# Altium PCB PCB1.PcbDoc (part 2 of 2)
Units mm, origin at the board's own origin, x right, y up, seen from the top; angles counter-clockwise.
Board outline 60 x 40 mm, 2 copper layers (Top Layer, Bottom Layer), stack 0.771 mm thick; 79 components, 50 nets, 240 pads, 354 vias.
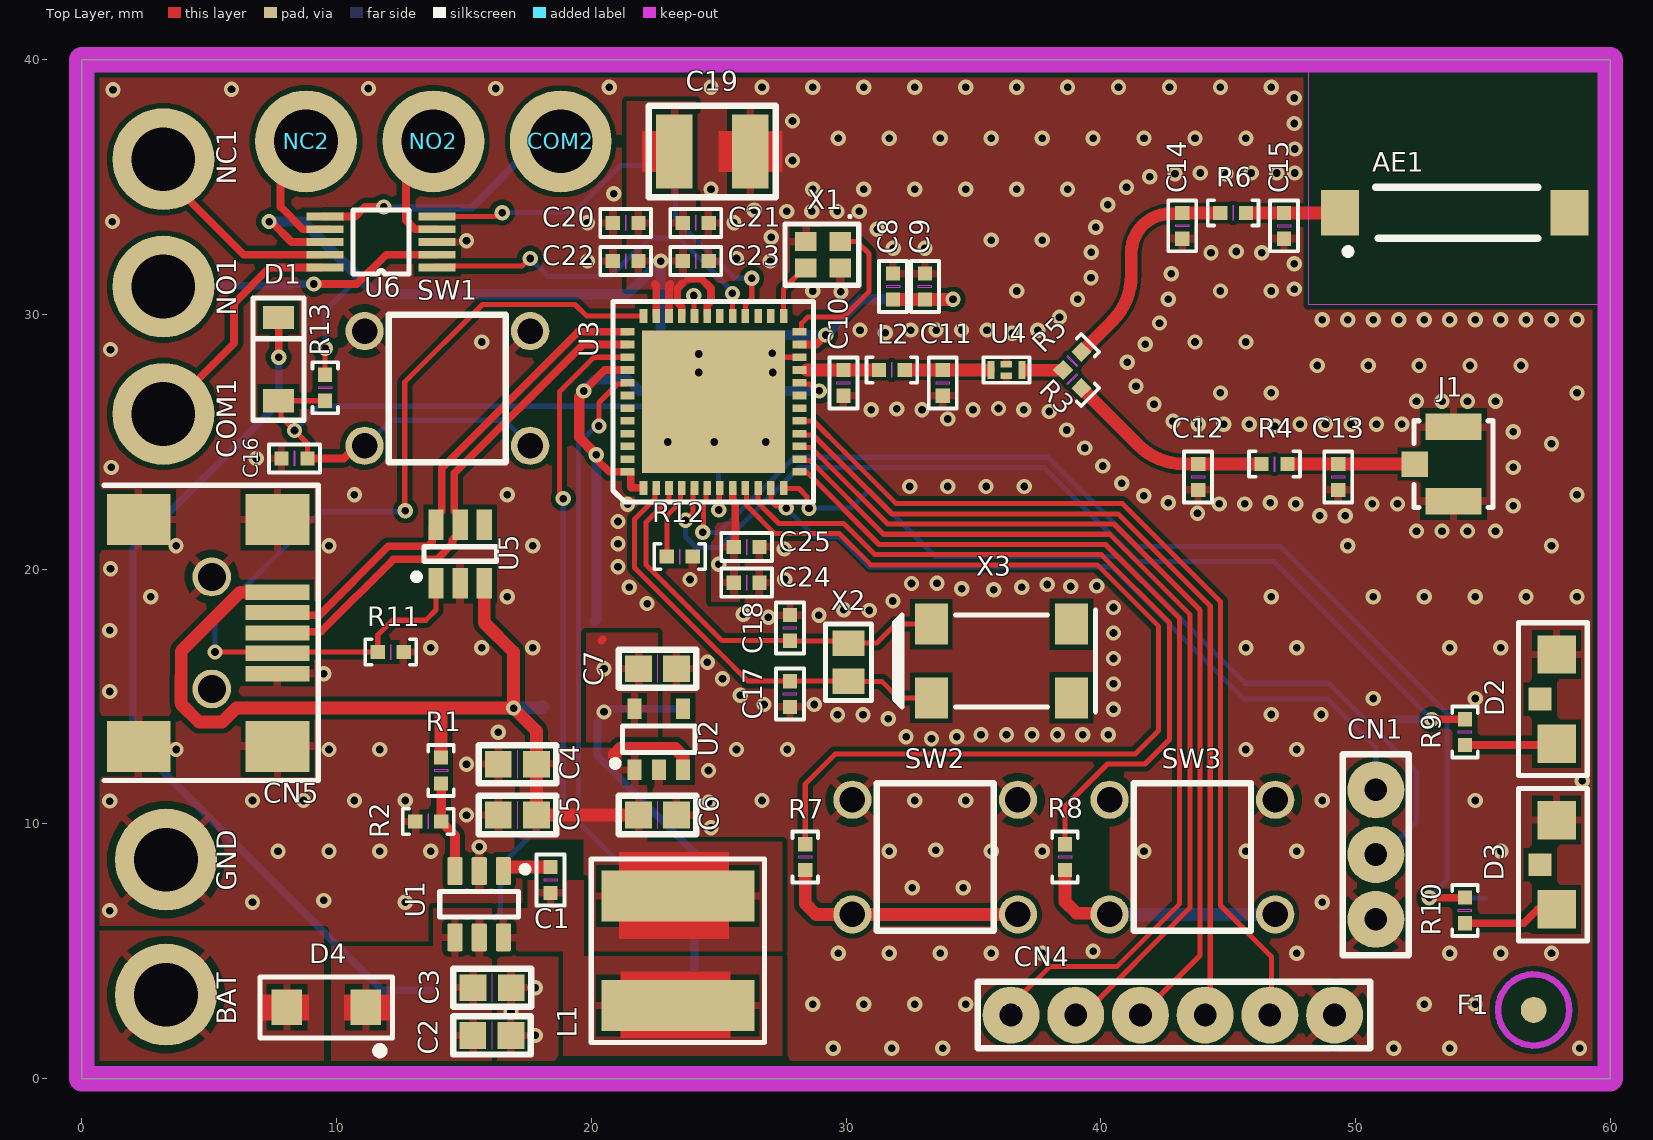
[diagram p0: Top Layer view]

## Part data (continued)
L2: "Inductor RF Chip Multi-Layer 2.7nH 0.3nH 100MHz 8Q-Factor Air 300mA 150mOhm DCR 0402 T/R", Case Code (Imperial)=0402, Case Code (Metric)=1005, Current Rating=300mA, DC Resistance (DCR)=150mR, Manufacturer=Murata, Max Operating Temperature=125°C, Min Operating Temperature=-55°C, Package Quantity=1, RMS Current (Irms)=800mA, Self Resonant Frequency=6GHz, Supplier Part Number=81-LQG15HS2N7S02D, Test Frequency=100MHz, Case/Package=0402, Category="Fixed Inductors", ComponentLink1Description=https://datasheet.ciiva.com/11801/0900766b8090d685-11801391.pdf?src-supplier=Rs, ComponentLink1URL=https://datasheet.ciiva.com/11801/0900766b8090d685-11801391.pdf?src-supplier=Rs, ComponentLink2Description=https://datasheet.ciiva.com/1038/l0075s0083lqg15hs-1038151.pdf?src-supplier=Digikey, ComponentLink2URL=https://datasheet.ciiva.com/1038/l0075s0083lqg15hs-1038151.pdf?src-supplier=Digikey, ComponentLink3Description=https://datasheet.ciiva.com/1038/l0075s0083lqg15hs-1038152.pdf?src-supplier=Digikey, ComponentLink3URL=https://datasheet.ciiva.com/1038/l0075s0083lqg15hs-1038152.pdf?src-supplier=Digikey, ComponentLink4Description=https://datasheet.ciiva.com/1038/l0075s0083lqg15hs-1038153.pdf?src-supplier=Digikey, ComponentLink4URL=https://datasheet.ciiva.com/1038/l0075s0083lqg15hs-1038153.pdf?src-supplier=Digikey, ComponentLink5Description=https://datasheet.ciiva.com/8510/l0075s0083lqg15hs-8510853.pdf?src-supplier=Avnet, ComponentLink5URL=https://datasheet.ciiva.com/8510/l0075s0083lqg15hs-8510853.pdf?src-supplier=Avnet, Core Material=Air, DC Current=300mA, Depth=0.55mm, ESR=120mR, Height=0.5mm, Height - Seated (Max)=0.022inch, Lead Free="Lead Free", Length=1mm, Manufacturer Part Number=LQG15HS2N7S02D, Max Current Rating=300mA, Max DC Current=300mA, Military Standard=Not, Mounting Technology="Surface Mount", Packaging="Tape and Reel", Pricing="1=0,1, 10=0,037, 50=0,037, 100=0,029, 1000=0,025, 10000=0,018 (USD)", Q Factor=8, Radiation Hardening=No, RoHS=Yes, RoHS Compliant=Yes, Series=LQG15HS, Shielding=Unshielded, Stock=7929, Supplier=Mouser, Termination=SMD/SMT, Width=0.02inch
R1: "RES - 118K 1/16W 0402 ±1%", Case Code (Imperial)=0402, Case Code (Metric)=1005, Manufacturer=Yageo, Max Operating Temperature=155°C, Max Power Dissipation=63mW, Min Operating Temperature=-55°C, Package Quantity=10000, Power Rating=62.5mW, Supplier Part Number=YAG2369CT-ND, Temperature Coefficient=100ppm/°C, Tolerance=1%, Voltage Rating=50V, .Mouting=SMT, .PCBChecked="Alex Batista", .SCHChecked="Alex Batista", Case/Package=0402, Category="Chip SMD Resistors", ComponentLink1Description=https://datasheet.ciiva.com/8887/pyu-rc0402-51-rohs-l-6-8887658.pdf?src-supplier=Avnet, ComponentLink1URL=https://datasheet.ciiva.com/8887/pyu-rc0402-51-rohs-l-6-8887658.pdf?src-supplier=Avnet, ComponentLink2Description=https://datasheet.ciiva.com/12558/pyu-rc0402-51-rohs-l-6-r-8721-12558524.pdf?src-supplier=Mouser, ComponentLink2URL=https://datasheet.ciiva.com/12558/pyu-rc0402-51-rohs-l-6-r-8721-12558524.pdf?src-supplier=Mouser, ComponentLink3Description=https://datasheet.ciiva.com/2552/pyu-r-int-thick-7-2552967.pdf?src-supplier=Digi-Key, ComponentLink3URL=https://datasheet.ciiva.com/2552/pyu-r-int-thick-7-2552967.pdf?src-supplier=Digi-Key, ComponentLink4Description=https://datasheet.ciiva.com/26829/getdatasheetpartid-702380-26829882.pdf?src-supplier=Verical, ComponentLink4URL=https://datasheet.ciiva.com/26829/getdatasheetpartid-702380-26829882.pdf?src-supplier=Verical, Construction=Rectangular, Contact Plating=Tin,Matte, Depth=0.5mm, Features="Moisture Resistant", Height=0.016inch, Lead Free="Lead Free", Length=1mm, Manufacturer 1=Yageo, Manufacturer Part Number=RC0402FR-07118KL, Manufacturer Part Number 1=RC0402FR-07118KL, Military Standard=Not, Number of Terminations=2, Packaging="Tape and Reel", Pricing="1=0.1, 10=0.014, 50=0.0084, 100=0.007, 500=0.00464, 1000=0.00396, 5000=0.00282 (USD)", RoHS=Yes, RoHS Compliant=Yes, Series=RC, Stock=556112, Supplier=Digi-Key, Termination=SMD/SMT, Voltage Rating (DC)=50V, Width=0.5mm
R2: "RES - 22K1 1/16W 0402 ±1%", Case Code (Imperial)=0402, Case Code (Metric)=1005, Manufacturer=Yageo, Max Operating Temperature=155°C, Max Power Dissipation=63mW, Min Operating Temperature=-55°C, Package Quantity=1, Power Rating=62.5mW, Resistance Tolerance=1%, Resistor Type="Thick Film", Supplier Part Number=311-22.1KLRCT-ND, Temperature Coefficient=100ppm/°C, Voltage Rating=50V, .Mouting=SMT, .PCBChecked="Alex Batista", .SCHChecked="Alex Batista", Case/Package=0402, Category="Chip SMD Resistors", ComponentLink1Description=https://datasheet.ciiva.com/2553/pyu-r-int-thick-7-2553200.pdf?src-supplier=Digi-Key, ComponentLink1URL=https://datasheet.ciiva.com/2553/pyu-r-int-thick-7-2553200.pdf?src-supplier=Digi-Key, ComponentLink2Description=https://datasheet.ciiva.com/2553/pyu-r-int-thick-7-2553201.pdf?src-supplier=Digi-Key, ComponentLink2URL=https://datasheet.ciiva.com/2553/pyu-r-int-thick-7-2553201.pdf?src-supplier=Digi-Key, ComponentLink3Description=https://datasheet.ciiva.com/2553/pyu-r-int-thick-7-2553202.pdf?src-supplier=Digi-Key, ComponentLink3URL=https://datasheet.ciiva.com/2553/pyu-r-int-thick-7-2553202.pdf?src-supplier=Digi-Key, Construction=Rectangular, Depth=0.5mm, Features="Moisture Resistant", Height=0.016inch, Lead Free="Lead Free", Length=0.039inch, Manufacturer 1=Yageo, Manufacturer Part Number=RC0402FR-0722K1L, Manufacturer Part Number 1=RC0402FR-0722K1L, Military Standard=Not, Number of Terminations=2, Packaging="Tape and Reel", Pricing="1=0.1, 10=0.014, 50=0.0084, 100=0.007, 500=0.00464, 1000=0.00396, 5000=0.00282 (USD)", Reach SVHC Compliant=No, RoHS=Yes, RoHS Compliant=Yes, Series=RC, Stock=435944, Supplier=Digi-Key, Technology="THICK FILM", Termination=SMD/SMT, Tolerance=1%, Voltage Rating (DC)=50V, Width=0.02inch, Working Voltage=50V
R3 R4 R5 R6: "GENERAL PURPOSE CHIP RESISTOR Metal Glaze/thick Film, 0.0625W, 0ohm, Surface Mount, 0402", Case Code (Imperial)=0402, Case Code (Metric)=1005, Manufacturer=Yageo, Max Operating Temperature=155°C, Max Power Dissipation=63mW, Min Operating Temperature=-55°C, Package Quantity=1, Power Rating=62.5mW, Resistance Tolerance=5%, Resistor Type="Thick Film", Supplier Part Number=3375797, Temperature Coefficient=200ppm/°C, Voltage Rating=50V, Case/Package=0402, Category="Chip SMD Resistors", ComponentLink1Description=https://datasheet.ciiva.com/2452/pyu-rc0402-51-rohs-l-6-2452608.pdf?src-supplier=Digikey, ComponentLink1URL=https://datasheet.ciiva.com/2452/pyu-rc0402-51-rohs-l-6-2452608.pdf?src-supplier=Digikey, ComponentLink2Description=https://datasheet.ciiva.com/11808/0900766b80c66297-11808195.pdf?src-supplier=Rs, ComponentLink2URL=https://datasheet.ciiva.com/11808/0900766b80c66297-11808195.pdf?src-supplier=Rs, ComponentLink3Description=https://datasheet.ciiva.com/2452/pyu-r-int-thick-7-2452609.pdf?src-supplier=Digikey, ComponentLink3URL=https://datasheet.ciiva.com/2452/pyu-r-int-thick-7-2452609.pdf?src-supplier=Digikey, ComponentLink4Description=https://datasheet.ciiva.com/2452/pyu-r-int-thick-7-2452610.pdf?src-supplier=Digikey, ComponentLink4URL=https://datasheet.ciiva.com/2452/pyu-r-int-thick-7-2452610.pdf?src-supplier=Digikey, ComponentLink5Description=https://datasheet.ciiva.com/8896/pyu-rc0402-51-rohs-l-6-8896201.pdf?src-supplier=Avnet, ComponentLink5URL=https://datasheet.ciiva.com/8896/pyu-rc0402-51-rohs-l-6-8896201.pdf?src-supplier=Avnet, ComponentLink6Description=https://datasheet.ciiva.com/15189/getdatasheetpartid-326379-15189533.pdf?src-supplier=Verical, ComponentLink6URL=https://datasheet.ciiva.com/15189/getdatasheetpartid-326379-15189533.pdf?src-supplier=Verical, ComponentLink7Description=https://datasheet.ciiva.com/7983/1018594-7983535.pdf?src-supplier=Element14, ComponentLink7URL=https://datasheet.ciiva.com/7983/1018594-7983535.pdf?src-supplier=Element14, ComponentLink8Description=https://datasheet.ciiva.com/22747/1018594-22747515.pdf?src-supplier=Element14, ComponentLink8URL=https://datasheet.ciiva.com/22747/1018594-22747515.pdf?src-supplier=Element14, Construction=Rectangular, Contact Plating=Tin,Matte, Depth=0.5mm, Features="Moisture Resistant", Height=0.016inch, Lead Free="Lead Free", Length=1mm, Manufacturer Part Number=RC0402JR-070RL, Military Standard=Not, Number of Terminations=2, Packaging="Tape and Reel", Pricing="10000=0,0007, 50000=0,0007, 200000=0,0007, 500000=0,0006, 1250000=0,0006 (USD)", Reach SVHC Compliant=Unknown, RoHS=Yes, RoHS Compliant=Yes, Series=RC, Stock=45190000, Supplier="Future Electronics", Technology="THICK FILM", Termination=SMD/SMT, Tolerance=5%, Width=0.02inch
R7 R8 R12: "SMD Chip Resistor 1 Kohm ½ 1% 62.5 Mw 0402 [1005 Metric] Thick Film General Purpose", Case Code (Imperial)=0402, Case Code (Metric)=1005, Manufacturer=Yageo, Max Operating Temperature=155°C, Max Power Dissipation=63mW, Min Operating Temperature=-55°C, Power Rating=62.5mW, Resistance Tolerance=1%, Resistor Type="Thick Film", Temperature Coefficient=100ppm/°C, Voltage Rating=50V, Case/Package=0402, Category="Chip SMD Resistors", ComponentLink1Description=https://datasheet.ciiva.com/11819/0900766b80c66297-11819477.pdf?src-supplier=Rs, ComponentLink1URL=https://datasheet.ciiva.com/11819/0900766b80c66297-11819477.pdf?src-supplier=Rs, ComponentLink2Description=https://datasheet.ciiva.com/7983/1018594-7983502.pdf?src-supplier=Element14, ComponentLink2URL=https://datasheet.ciiva.com/7983/1018594-7983502.pdf?src-supplier=Element14, ComponentLink3Description=https://datasheet.ciiva.com/22747/1018594-22747513.pdf?src-supplier=Element14, ComponentLink3URL=https://datasheet.ciiva.com/22747/1018594-22747513.pdf?src-supplier=Element14, ComponentLink4Description=https://datasheet.ciiva.com/17063/pyu-rc0402-51-rohs-l-6-r-17063193.pdf?src-supplier=Future+Electronics, ComponentLink4URL=https://datasheet.ciiva.com/17063/pyu-rc0402-51-rohs-l-6-r-17063193.pdf?src-supplier=Future+Electronics, ComponentLink5Description=https://datasheet.ciiva.com/7849/1018594-7849869.pdf?src-supplier=Element14, ComponentLink5URL=https://datasheet.ciiva.com/7849/1018594-7849869.pdf?src-supplier=Element14, ComponentLink6Description=https://datasheet.ciiva.com/7849/1018594-7849871.pdf?src-supplier=Element14, ComponentLink6URL=https://datasheet.ciiva.com/7849/1018594-7849871.pdf?src-supplier=Element14, ComponentLink7Description=https://datasheet.ciiva.com/12666/pyu-rc0402-51-rohs-l-6-r-12666741.pdf?src-supplier=Mouser, ComponentLink7URL=https://datasheet.ciiva.com/12666/pyu-rc0402-51-rohs-l-6-r-12666741.pdf?src-supplier=Mouser, Construction=Rectangular, Depth=0.5mm, Features="Moisture Resistant", Height=0.32mm, Lead Free="Lead Free", Length=1mm, Manufacturer Part Number=RC0402FR-071KL, Military Standard=Not, Number of Terminations=2, Packaging="Tape and Reel", Pins=2, Pricing="10000=0,00097, 20000=0,00093, 40000=0,0009, 60000=0,00087, 80000=0,00084 (USD)", Reach SVHC Compliant=No, RoHS=Yes, RoHS Compliant=Yes, Series=RC, Stock=9660000, Supplier=Avnet, Supplier Part Number=RC0402FR-071KL, Technology="THICK FILM", Termination=SMD/SMT, Tolerance=1%, Voltage Rating (AC)=50V, Voltage Rating (DC)=50V, Width=0.5mm
R9 R10: "Res Thick Film 0402 330 Ohm 5% 1/16W ±100ppm/°C Molded SMD SMD Paper T/R", Case/Package=0402, Manufacturer=Yageo, Max Operating Temperature=155°C, Min Operating Temperature=-55°C, Power Rating=63mW, Supplier Part Number=13-RC0402JR-13330RLCT-ND, Temperature Coefficient=100ppm/°C, Tolerance=5%, Category="Chip SMD Resistors", ComponentLink1Description=https://datasheet.ciiva.com/17423/pyu-rc0402-51-rohs-l-6-r-17423686.pdf?src-supplier=Future+Electronics, ComponentLink1URL=https://datasheet.ciiva.com/17423/pyu-rc0402-51-rohs-l-6-r-17423686.pdf?src-supplier=Future+Electronics, Construction=Rectangular, Contact Plating=Tin,Matte, Depth=0.5mm, Lead Free="Lead Free", Length=1mm, Manufacturer Part Number=RC0402JR-13330RL, Military Standard=Not, Packaging="Tape and Reel", Pricing="1=0,1, 10=0,006, 50=0,0056, 100=0,0051, 500=0,0046, 1000=0,00306, 5000=0,00246 (USD)", RoHS=Yes, RoHS Compliant=Yes, Stock=107022, Supplier=Digikey
R11 R13: "SMD Chip Resistor, 100 Kohm, ½ 5%, 62.5 Mw, 0402 [1005 Metric], Thick Film, General Purpose", Case Code (Imperial)=0402, Case Code (Metric)=1005, Manufacturer=Yageo, Max Operating Temperature=155°C, Max Power Dissipation=63mW, Min Operating Temperature=-55°C, Power Rating=62.5mW, Resistance Tolerance=5%, Resistor Type="Thick Film", Supplier Part Number=4246625, Temperature Coefficient=100ppm/°C, Voltage Rating=50V, Case/Package=0402, Category="Chip SMD Resistors", ComponentLink1Description=https://datasheet.ciiva.com/2491/pyu-r-int-thick-7-2491208.pdf?src-supplier=Digikey, ComponentLink1URL=https://datasheet.ciiva.com/2491/pyu-r-int-thick-7-2491208.pdf?src-supplier=Digikey, ComponentLink2Description=https://datasheet.ciiva.com/2491/pyu-r-int-thick-7-2491209.pdf?src-supplier=Digikey, ComponentLink2URL=https://datasheet.ciiva.com/2491/pyu-r-int-thick-7-2491209.pdf?src-supplier=Digikey, ComponentLink3Description=https://datasheet.ciiva.com/2491/pyu-r-int-thick-7-2491207.pdf?src-supplier=Digikey, ComponentLink3URL=https://datasheet.ciiva.com/2491/pyu-r-int-thick-7-2491207.pdf?src-supplier=Digikey, ComponentLink4Description=https://datasheet.ciiva.com/17052/pyu-rc0402-51-rohs-l-6-r-17052137.pdf?src-supplier=Future+Electronics, ComponentLink4URL=https://datasheet.ciiva.com/17052/pyu-rc0402-51-rohs-l-6-r-17052137.pdf?src-supplier=Future+Electronics, ComponentLink5Description=https://datasheet.ciiva.com/46394/1018594-46394941.pdf?src-supplier=Element14, ComponentLink5URL=https://datasheet.ciiva.com/46394/1018594-46394941.pdf?src-supplier=Element14, ComponentLink6Description=https://datasheet.ciiva.com/7850/1018594-7850133.pdf?src-supplier=Element14, ComponentLink6URL=https://datasheet.ciiva.com/7850/1018594-7850133.pdf?src-supplier=Element14, ComponentLink7Description=https://datasheet.ciiva.com/12668/pyu-rc0402-51-rohs-l-6-r-12668218.pdf?src-supplier=Mouser, ComponentLink7URL=https://datasheet.ciiva.com/12668/pyu-rc0402-51-rohs-l-6-r-12668218.pdf?src-supplier=Mouser, Construction=Rectangular, Depth=0.5mm, Features="Moisture Resistant", Lead Free="Lead Free", Length=1mm, Manufacturer Part Number=RC0402JR-07100KL, Military Standard=Not, Number of Terminations=2, Packaging="Tape and Reel", Pricing="10000=0,0006, 50000=0,0006, 250000=0,0005, 500000=0,0005, 1500000=0,0005 (USD)", Reach SVHC Compliant=Unknown, RoHS=Yes, RoHS Compliant=Yes, Series=RC, Stock=7850000, Supplier="Future Electronics", Termination=SMD/SMT, Tolerance=5%, Voltage Rating (AC)=50V
SW1 SW2 SW3: Manufacturer="Same Sky", Category="Tactile Switches", Manufacturer Part Number=TS02-66-130-BK-260-LCR-D
TP1 TP2 TP3 TP4 TP5 TP6 TP7 TP8: "Test Point"
U1: library part LMR54410DBVR, "IC - DC/DC BUCK, Current-mode, 1A, 1100kHz SOT32-6", Manufacturer="Texas Instruments", Supplier Part Number=296-LMR54410DBVRCT-ND, .Mouting=SMT, .PCBChecked="Alex Batista", .SCHChecked="Alex Batista", Category="Voltage Regulators - Switching", Manufacturer 1="Texas Instruments", Manufacturer Part Number=LMR54410DBVR, Manufacturer Part Number 1=LMR54410DBVR, Pricing="1=1.07, 10=0.959, 25=0.9108, 100=0.748, 250=0.69924, 500=0.61792, 1000=0.48783 (USD)", RoHS=No, Stock=13950, Supplier=Digi-Key
U2: "Ldo, Fixed, 3.3V, 0.6A, -40 To 85Deg C Rohs Compliant: Yes", Manufacturer=Diodes, Output Voltage=3.3V, Supplier Part Number=8130059, ComponentLink1Description=https://datasheet.octopart.com/AP7366-33W5-7-Diodes-Inc.-datasheet-147761854.pdf?src-supplier=Farnell, ComponentLink1URL=https://datasheet.octopart.com/AP7366-33W5-7-Diodes-Inc.-datasheet-147761854.pdf?src-supplier=Farnell, ComponentLink2Description=https://www.diodes.com/assets/Datasheets/AP7366.pdf?src-supplier=Digikey, ComponentLink2URL=https://www.diodes.com/assets/Datasheets/AP7366.pdf?src-supplier=Digikey, Manufacturer Part Number=AP7366-33W5-7, Number of Channels=1NUMBER, Pricing="3000=0,0633, 9000=0,0609, 15000=0,0598, 30000=0,0584, 60000=0,0561 (USD)", RoHS=Yes, Stock=9000, Supplier="Future Electronics"
U3: "MCU 32-Bit STM32WB55 ARM Cortex-M4F RISC 256KB Flash 1.71V to 3.6V 48-Pin UFQFPN T/R", Case/Package=UFQFPN, Current - Receiving=7.9mA, Current - Transmitting=12.7mA, Frequency=2.48GHz, Manufacturer=STMicroelectronics, Max Operating Temperature=105°C, Min Operating Temperature=-40°C, Supplier Part Number=497-STM32WB55CCU6-ND, Category=Microcontrollers, ComponentLink1Description=https://www.st.com/resource/en/datasheet/stm32wb55cc.pdf?src-supplier=Digikey, ComponentLink1URL=https://www.st.com/resource/en/datasheet/stm32wb55cc.pdf?src-supplier=Digikey, Data Rate=2Mbps, Interface=I2C,SPI,USB,UART,USART, Manufacturer Part Number=STM32WB55CCU6, Memory Size=256KB, Mounting Technology="Surface Mount", Number of GPIO=30, Pricing="1=5,19, 10=3,989, 25=3,6896, 80=3,41638 (USD)", RoHS=Yes, Sensitivity=-100dBm, Series=-, Stock=2269, Supplier=Digikey
U4: "FILTER, LOW PASS, 2.4GHz to 2.5GHz; Filter Type: Low Pass; Pass Band Frequency: 2.", Case Code (Imperial)=0603, Case Code (Metric)=1608, Frequency=2.45GHz, Manufacturer=TDK, Max Operating Temperature=85°C, Min Operating Temperature=-40°C, Package Quantity=4000, Supplier Part Number=445-15658-1-ND, Case/Package=0603, ComponentLink1Description=https://datasheet.ciiva.com/24123/dlf162500lt-5028a1-279920-24123794.pdf?src-supplier=Mouser, ComponentLink1URL=https://datasheet.ciiva.com/24123/dlf162500lt-5028a1-279920-24123794.pdf?src-supplier=Mouser, ComponentLink2Description=https://datasheet.ciiva.com/23909/1751212-23909058.pdf?src-supplier=Newark, ComponentLink2URL=https://datasheet.ciiva.com/23909/1751212-23909058.pdf?src-supplier=Newark, ComponentLink3Description=https://datasheet.ciiva.com/30018/rf-lpf-dlf162500lt-5028a1-en-30018074.pdf?src-supplier=Avnet, ComponentLink3URL=https://datasheet.ciiva.com/30018/rf-lpf-dlf162500lt-5028a1-en-30018074.pdf?src-supplier=Avnet, Insertion Loss=0.33dB, Manufacturer Part Number=DLF162500LT-5028A1, Mounting Technology="Surface Mount", Packaging="Tape and Reel", Pins=4, Pricing="1=0,48, 10=0,39, 25=0,3596, 50=0,3382, 100=0,318, 250=0,29324, 500=0,2758, 1000=0,25939 (USD)", Radiation Hardening=No, RoHS=Yes, RoHS Compliant=Yes, Series=DLF, Stock=8661, Supplier=Digikey, Termination=SMD/SMT
U5: "USBLC6 Series 4 Line 6 V Uni / Bi-Directional ESD Protection - SOT-23-6", Breakdown Voltage=6V, Case/Package=SOT-23, Clamping Voltage=17V, Leakage Current=150nA, Manufacturer=STMicroelectronics, Max Breakdown Voltage=10V, Max Operating Temperature=125°C, Max Reverse Leakage Current=2uA, Min Operating Temperature=-40°C, Operating Supply Voltage=860mV, Peak Pulse Current=5A, Peak Pulse Power=130W, Power Line Protection=Yes, Reverse Standoff Voltage=5V, Supplier Part Number=5949821, Test Current=1mA, Category="TVS Diodes", Clamping Voltage-Max=17V, ComponentLink1Description=https://datasheet.ciiva.com/16206/cd00047494-16206119.pdf?src-supplier=Future+Electronics, ComponentLink1URL=https://datasheet.ciiva.com/16206/cd00047494-16206119.pdf?src-supplier=Future+Electronics, ComponentLink2Description=https://datasheet.ciiva.com/15143/getdatasheetpartid-88767-15143364.pdf?src-supplier=Verical, ComponentLink2URL=https://datasheet.ciiva.com/15143/getdatasheetpartid-88767-15143364.pdf?src-supplier=Verical, ComponentLink3Description=https://datasheet.ciiva.com/27052/1493951-27052291.pdf?src-supplier=Jameco, ComponentLink3URL=https://datasheet.ciiva.com/27052/1493951-27052291.pdf?src-supplier=Jameco, ComponentLink4Description=https://datasheet.ciiva.com/14186/usblc6-4-st-eng-tds-14186570.pdf?src-supplier=Distrelec, ComponentLink4URL=https://datasheet.ciiva.com/14186/usblc6-4-st-eng-tds-14186570.pdf?src-supplier=Distrelec, ComponentLink5Description=https://datasheet.ciiva.com/1220/48344-1220005.pdf?src-supplier=Newark, ComponentLink5URL=https://datasheet.ciiva.com/1220/48344-1220005.pdf?src-supplier=Newark, ComponentLink6Description=https://datasheet.ciiva.com/4507/cd00047494-112581-4507757.pdf?src-supplier=Mouser, ComponentLink6URL=https://datasheet.ciiva.com/4507/cd00047494-112581-4507757.pdf?src-supplier=Mouser, ComponentLink7Description=https://datasheet.ciiva.com/22685/1498406-22685833.pdf?src-supplier=Element14, ComponentLink7URL=https://datasheet.ciiva.com/22685/1498406-22685833.pdf?src-supplier=Element14, ComponentLink8Description=https://datasheet.ciiva.com/22692/1498406-22692454.pdf?src-supplier=Element14, ComponentLink8URL=https://datasheet.ciiva.com/22692/1498406-22692454.pdf?src-supplier=Element14, Depth=1.75mm, Direction=Unidirectional, ESD Protection=Yes, Height=1.3mm, Interface=224,1515Interface, Lead Free="Lead Free", Length=3.05mm, Manufacturer Part Number=USBLC6-4SC6, Min Breakdown Voltage=6V, Mounting Technology="Surface Mount", Number of Channels=4, Number of Elements=1, Number of Unidirectional Channels=4, Packaging="Tape and Reel", Pins=6, Polarity=Unidirectional,Bidirectional, Pricing="3000=0,0692, 9000=0,0666, 15000=0,0654, 30000=0,0638, 60000=0,0614 (USD)", Radiation Hardening=No, Reach SVHC Compliant=No, Reverse Breakdown Voltage=6V, RoHS=Yes, RoHS Compliant=Yes, Series=USB, Stock=1416000, Supplier="Future Electronics", Termination=SMD/SMT, Voltage Rating (DC)=5V, Width=1.75mm, Working Voltage=5V
U6: "Integrated Circuit Analog Switch; 5-V, 2: 1 (SPDT), 2-channel analog switch 10-VSSOP -40 to 125", Case/Package=VSSOP, Manufacturer="Texas Instruments", Max Operating Temperature=85°C, Max Supply Current=1uA, Max Supply Voltage=5.5V, Min Operating Temperature=-40°C, Min Supply Voltage=1.8V, Supplier Part Number=595-TS5A23157DGSR, -3db Bandwidth=220MHz, Bandwidth=220MHz, Category="Interface ICs", ComponentLink1Description=https://datasheet.ciiva.com/1670/ts5a23157-1670544.pdf?src-supplier=Digikey, ComponentLink1URL=https://datasheet.ciiva.com/1670/ts5a23157-1670544.pdf?src-supplier=Digikey, ComponentLink2Description=https://datasheet.ciiva.com/2978/ts5a23157-2978976.pdf?src-supplier=Avnet, ComponentLink2URL=https://datasheet.ciiva.com/2978/ts5a23157-2978976.pdf?src-supplier=Avnet, ComponentLink3Description=https://datasheet.ciiva.com/15127/getdatasheetpartid-249170-15127550.pdf?src-supplier=Verical, ComponentLink3URL=https://datasheet.ciiva.com/15127/getdatasheetpartid-249170-15127550.pdf?src-supplier=Verical, ComponentLink4Description=https://datasheet.ciiva.com/1670/ts5a23157-1670545.pdf?src-supplier=Digikey, ComponentLink4URL=https://datasheet.ciiva.com/1670/ts5a23157-1670545.pdf?src-supplier=Digikey, ComponentLink5Description=https://datasheet.ciiva.com/1670/ts5a23157-1670616.pdf?src-supplier=Digikey, ComponentLink5URL=https://datasheet.ciiva.com/1670/ts5a23157-1670616.pdf?src-supplier=Digikey, ComponentLink6Description=https://datasheet.ciiva.com/1514/1836502-1514585.pdf?src-supplier=Element14, ComponentLink6URL=https://datasheet.ciiva.com/1514/1836502-1514585.pdf?src-supplier=Element14, ComponentLink7Description=https://datasheet.ciiva.com/41675/1836502-41675240.pdf?src-supplier=Newark, ComponentLink7URL=https://datasheet.ciiva.com/41675/1836502-41675240.pdf?src-supplier=Newark, Lead Free="Lead Free", Manufacturer Part Number=TS5A23157DGSR, Mounting Technology="Surface Mount", Number of Bits=2, Number of Channels=2, Number of Circuits=2, Number of Inputs=2, Number of Outputs=4, Packaging="Tape and Reel", Pins=10, Pricing="1=0,43, 10=0,297, 50=0,266, 100=0,23, 1000=0,194, 10000=0,177 (USD)", Radiation Hardening=No, Reach SVHC Compliant=Unknown, RoHS=Yes, RoHS Compliant=Yes, Series=-, Stock=25483, Supplier=Mouser, Supply Type=Single, Thickness=1.02mm, Weight=0.000663oz
X1: "Crystal 32.0000MHZ 10PF SMD", Case/Package=SMD/SMT, ESR (Equivalent Series Resistance)=60R, Frequency=32MHz, Load Capacitance=10pF, Manufacturer=NDK, Supplier Part Number=344-NX2016SA32S06465, Category=Crystals, ComponentLink1Description=https://media.digikey.com/pdf/Data%20Sheets/NDK%20PDFs/NX2016SA-32M-EXS00A-CS06465_SS.pdf?src-supplier=Digikey, ComponentLink1URL=https://media.digikey.com/pdf/Data%20Sheets/NDK%20PDFs/NX2016SA-32M-EXS00A-CS06465_SS.pdf?src-supplier=Digikey, Manufacturer Part Number=NX2016SA-32M-EXS00A-CS06465, Mounting Technology="Surface Mount", Packaging="Cut Tape", Pricing="1=0,56, 10=0,438, 50=0,438, 100=0,411, 1000=0,349, 10000=0,283 (USD)", RoHS=No, Series=NX2016SA, Stock=30578, Supplier=Mouser
X2: "Parallel - Fundamental Quartz Crystal, 0.032768MHz Nom", Case/Package=SMD/SMT, ESR (Equivalent Series Resistance)=80kR, Frequency=32.768kHz, Frequency Tolerance=20ppm, Load Capacitance=12.5pF, Manufacturer=NDK, Max Operating Temperature=85°C, Min Operating Temperature=-40°C, Supplier Part Number=344-NX2012SA32768K1, Tolerance=0.002%, Category=Crystals, ComponentLink1Description=http://www.ndk.com/images/products/catalog/c_NX2012SA-STD-MUB-1_e.pdf?src-supplier=Digikey, ComponentLink1URL=http://www.ndk.com/images/products/catalog/c_NX2012SA-STD-MUB-1_e.pdf?src-supplier=Digikey, Height=0.024inch, Length=0.081inch, Manufacturer Part Number=NX2012SA-32.768K-STD-MUB-1, Mounting Technology="Surface Mount", Packaging="Cut Tape", Pricing="1=0,84, 10=0,659, 50=0,659, 100=0,6, 1000=0,5, 10000=0,414 (USD)", RoHS=Yes, RoHS Compliant=Yes, Series=NX2012SA, Stock=8641, Supplier=Mouser, Width=0.047inch
X3: "Crystal 0.032768MHz ±20ppm (Tol) 12.5pF FUND 50000Ohm 4-Pin SMD T/R", ESR (Equivalent Series Resistance)=50kR, Frequency=32.768kHz, Frequency Tolerance=20ppm, Load Capacitance=12.5pF, Manufacturer="ECS International", Max Operating Temperature=85°C, Min Operating Temperature=-40°C, Package Quantity=3000, Supplier Part Number=XC1195CT-ND, Category=Crystals, ComponentLink1Description=https://datasheet.ciiva.com/852/ecx-306x-852775.pdf?src-supplier=Digikey, ComponentLink1URL=https://datasheet.ciiva.com/852/ecx-306x-852775.pdf?src-supplier=Digikey, ComponentLink2Description=https://datasheet.ciiva.com/852/ecx-306x-852776.pdf?src-supplier=Digikey, ComponentLink2URL=https://datasheet.ciiva.com/852/ecx-306x-852776.pdf?src-supplier=Digikey, ComponentLink3Description=https://datasheet.ciiva.com/852/ecx-306x-852777.pdf?src-supplier=Digikey, ComponentLink3URL=https://datasheet.ciiva.com/852/ecx-306x-852777.pdf?src-supplier=Digikey, Height=2.5mm, Lead Free="Lead Free", Length=8mm, Manufacturer Part Number=ECS-.327-12.5-17X-TR, Mounting Technology="Surface Mount", Packaging="Tape and Reel", Pricing="1=0,61, 10=0,53, 50=0,4808, 100=0,461, 500=0,41788, 1000=0,40059 (USD)", RoHS=Yes, RoHS Compliant=Yes, Series=ECX-306X, Stock=164259, Supplier=Digikey, Termination=SMD/SMT, Tolerance=20ppm, Width=3.8mm

## Via types
v1: diameter 0.6, hole 0.3, Top Layer to Bottom Layer, tented both sides, 354 vias

## Nets (pads, with @x,y where several pads share a name; then routed paths per layer and width w, separated by ;. In a path a pad name is that pad's centre, name@x,y a point inside that pad or via, vN(x,y) a via of type N, cw(c..) or ccw(c..) an arc to the next point about the centre after c; other vN are vias at no path point)
3V3: C7.2 C8.2 C9.2 C19.2 C20.2 C21.2 C22.2 C23.2 C24.2 C25.2 CN3.1 R13.1 TP2.1 U2.5 U3.1 U3.8 U3.20 U3.23 U3.31 U3.33 U3.34 U3.35 U3.40 U3.48 U6.8 | length 93.6
  Top Layer w0.2: R13.1 v1(9.55,28.675) ; U3.20 28.225,27.275 28.574,27.275 28.847,27.003 v1(28.949,27.003)
  Top Layer w0.3: v1(7.35,33.65) 7.431,33.65 8.231,32.85 U6.8@9.359,32.85 ; v1(19.7,27) 20.525,27.825 U3.40 ; v1(20.2,24.5) 20.257,24.443 20.257,24.268 20.7,23.825 U3.48 21.55,23.825 21.55,23.226 21.576,23.2 U3.1 ; 20.4,17.2 20.451,17.251 ; 22.5,31.2 22.55,31.15 U3.35 ; U3.34 23.05,31.15 23.1,31.2 ; U3.33 23.55,30.303 23.373,30.481 23.373,31.019 23.577,31.223 ; 23.784,31.4 24.324,31.4 24.7,31.024 24.7,30.52 24.55,30.37 U3.31 ; U3.8 25.55,22.694 25.65,22.594 25.65,21.158 C25.2@25.592,21.1 ; U3.23 28.825,28.825 v1(29.2,29.2)
  Top Layer w0.4: v1(19.7,27) 19.7,26.946 19.525,26.771 19.525,25.175 v1(20.2,24.5)
  Top Layer w0.5: C8.2 C9.2 34.192,30.592 v1(34.2,30.6)
  Bottom Layer w0.2: v1(9.55,28.675) 9.55,30.138 10.877,31.465
  Bottom Layer w0.3: TP2.1 20.706,14.525 20.581,14.4 v1(20.5,14.4) 20.5,14.319 20.25,14.069 20.25,14.025 20.242,14.017 20.242,12.683 24.05,8.875 CN3.1
  Bottom Layer w0.4: v1(7.35,33.65) 8.692,33.65 10.877,31.465 11.542,30.8 21.417,30.8 v1@22.717,32.1 ; v1@19.7,27.008 20.142,27.45 21.442,27.45 21.89,27.003 22.711,27.003 ; 20.125,17.949 20.2,18.024 v1(20.2,24.5) ; v1@22.717,32.092 22.717,29.14 ; v1(28.949,27.003) 22.711,27.003 ; v1(29.2,29.2) 22.777,29.2 22.717,29.14 ; v1@29.2,29.208 30.592,30.6 v1(34.2,30.6) ; 22.711,27.003 22.717,27.009 22.717,29.14
  other v1: 20.5,16.1 25,20.2 22.725,32.1
5V: C4.2 C5.2 C6.2 CN5.1 L1.2 R1.2 TP1.1 U2.1 U2.3 U5.3 | length 40.2
  Top Layer w0.5: CN5.1@7,19.1 6.214,19.1 3.9,16.786 3.9,15.814 3.888,15.802 3.888,14.798 3.9,14.786 3.9,14.7 4.6,14 5.514,14 6.064,14.55 14.1,14.55 ; R1.2 14.1,14.55 ; U5.3 15.8,17.9 16.95,16.75 v1(16.95,14.55) ; 20.907,12.732 21.15,12.975 23.282,12.975 23.6,12.657 U2.3 ; C6.2 C5.2 C4.2 17.85,13.65 v1(16.95,14.55) ; 14.1,14.55 v1(16.95,14.55)
  Bottom Layer w0.5: v1(16.95,14.55) 16.969,14.569 18.069,14.569 TP1.1
BAT: C2.2 C3.2 D4.1 U1.4 U1.5
GND: C2.1 C3.1 C4.1 C5.1 C6.1 C7.1 C8.1 C9.1 C10.1 C11.1 C12.1 C13.1 C14.1 C15.1 C16.2 C17.1 C18.2 C19.1 C20.1 C21.1 C22.1 C23.1 C24.1 C25.1 CN1.3 CN3.3 CN4.6 CN5.5 CN5.6 CN5.7 CN5.8 CN5.9 CN5.10 CN5.11 D2.2 D3.2 GND.1 J1.2 J1.3 R2.1 R11.1 R12.2 SW1.3 SW1.4 SW2.3 SW2.4 SW3.3 SW3.4 U1.2 U2.2 U3.22 U3.32 U3.49 U4.2 U4.4 U5.2 U6.3 X1.2 X1.4 | length 6.7
  Top Layer w0.2: U3.49@23.55,25.325 U3.49 26.55,28.325 U3.22 ; v1(24.023,30.75) 24.036,30.736 24.036,29.964 U3.32
  other v1: 29.5,1.2 31.8,1.2 33.8,1.2 51.5,1.2 53.7,1.2 58.8,1.2 17.8,1.7 16.85,2.625 28.7,2.925 30.7,2.925 32.7,2.925 34.7,2.925 52.7,2.925 54.7,2.925 17.8,3.575 29.7,4.925 31.7,4.925 33.7,4.925 35.7,4.925 37.7,4.925 47.7,4.925 53.7,4.925 55.7,4.925 57.7,4.925 39.7,5 1.1,6.6 6.7,6.925 12.7,6.925 48.7,6.925 9.5,7 32.6,7.5 34.6,7.5 7.7,8.925 9.7,8.925 11.7,8.925 13.7,8.925 31.7,8.925 35.7,8.925 37.7,8.925 41.7,8.925 45.7,8.925 47.7,8.925 55.7,8.925 33.525,8.975 15.6,9.1 24.7,9.85 15.1,10.35 24.6,10.85 1.1,10.9 6.7,10.925 8.7,10.925 10.7,10.925 12.7,10.925 26.7,10.925 32.7,10.925 34.7,10.925 48.7,10.925 54.7,10.925 58.9,11.7 24.6,12.1 15.1,12.35 3.7,12.925 9.7,12.925 11.7,12.925 25.7,12.925 27.7,12.925 45.7,12.925 47.7,12.925 33.356,13.351 32.36,13.425 34.352,13.43 35.3,13.5 36.3,13.5 37.3,13.5 38.3,13.5 39.3,13.5 40.3,13.5 16.35,13.6 31.654,14.134 29.667,14.293 30.667,14.293 46.7,14.3 48.651,14.3 40.5,14.5 26.78,14.693 28.75,14.693 50.7,14.925 54.7,14.925 25.849,15.057 1.1,15.2 40.5,15.5 25.15,15.7 9.5,15.9 24.558,16.354 40.5,16.5 13.7,16.925 15.7,16.925 17.7,16.925 45.7,16.925 47.7,16.925 53.7,16.925 55.7,16.925 40.5,17.5 1.1,17.6 26.954,18.115 28.937,18.196 25.961,18.233 30.914,18.382 29.914,18.407 40.5,18.5 22.19,18.653 31.841,18.757 2.7,18.925 16.7,18.925 46.7,18.925 50.7,18.925 52.7,18.925 54.7,18.925 56.7,18.925 58.7,18.925 35.8,19.2 34.547,19.238 21.492,19.296 36.9,19.3 38.826,19.326 39.843,19.343 37.9,19.4 32.572,19.44 33.571,19.457 23.875,19.6 27.6,19.6 1.125,20.025 21.05,20.1 27.575,20.8 3.7,20.925 9.7,20.925 17.7,20.925 49.7,20.925 57.7,20.925 21.05,21 52.4,21.5 53.4,21.5 54.4,21.5 55.5,21.5 21.05,21.875 48.6,22.1 49.6,22.1 43.8,22.2 56.2,22.5 21.425,22.55 44.656,22.567 45.656,22.567 47.654,22.567 50.654,22.567 51.654,22.567 42.657,22.618 46.655,22.609 41.694,22.888 10.7,22.925 16.7,22.925 58.7,22.925 32.5,23.25 34,23.25 35.5,23.25 37,23.25 40.824,23.381 1.15,24 56.2,24 40.085,24.054 6.85,24.35 39.378,24.761 57.7,24.925 23,25 24.825,25 26.85,25 56.2,25.4 38.67,25.468 46.829,25.613 43.833,25.699 44.833,25.699 45.833,25.699 47.825,25.699 48.825,25.699 49.825,25.699 50.825,25.699 51.825,25.699 42.839,25.809 34,25.9 37.981,26.192 30.988,26.259 32.986,26.259 34.986,26.259 36.984,26.266 31.987,26.297 35.985,26.314 42.093,26.475 52.4,26.6 53.4,26.6 54.4,26.6 55.5,26.6 44.7,26.925 46.7,26.925 58.7,26.925 41.386,27.182 24.225,27.725 27.125,27.725 48.5,28 50.5,28 52.5,28 54.5,28 56.5,28 41.046,28.123 24.225,28.45 27.1,28.475 1.125,28.625 41.743,28.839 15.7,28.925 43.7,28.925 45.7,28.925 36.53,29.269 31.543,29.291 30.548,29.391 32.537,29.391 33.537,29.391 34.537,29.391 35.537,29.391 37.523,29.383 42.306,29.666 48.7,29.8 49.7,29.8 50.7,29.8 51.7,29.8 52.7,29.8 53.7,29.8 54.7,29.8 55.7,29.8 56.7,29.8 57.7,29.8 58.7,29.8 38.385,29.891 39.092,30.599 42.652,30.604 29.8,30.9 28.7,30.925 36.7,30.925 44.7,30.925 46.7,30.925 47.6,31 39.621,31.447 42.766,31.598 47.6,32 19.85,32.1 27.025,32.1 25.699,32.199 39.634,32.447 44.328,32.425 46.325,32.425 45.326,32.479 31.85,32.6 33.1,32.6 15.1,32.9 35.7,32.925 37.7,32.925 27.063,33.037 31.225,33.35 39.806,33.432 19.85,33.6 25.6,33.6 1.2,33.65 27.675,34.05 28.65,34.05 29.65,34.05 30.525,34.05 26.4,34.1 40.281,34.312 20.887,34.738 24.7,34.925 28.7,34.925 30.7,34.925 32.7,34.925 34.7,34.925 36.7,34.925 38.7,34.925 41.012,34.994 41.92,35.413 42.914,35.526 44.913,35.534 43.913,35.557 45.913,35.557 46.913,35.557 47.613,35.557 27.9,36.05 47.623,36.5 29.7,36.925 31.7,36.925 33.7,36.925 35.7,36.925 37.7,36.925 39.7,36.925 41.7,36.925 43.7,36.925 45.7,36.925 47.6,37.5 27.9,37.6 47.6,38.5 1.225,38.825 5.875,38.85 11.25,38.875 16.25,38.875 20.7,38.925 24.7,38.925 26.7,38.925 28.7,38.925 30.7,38.925 32.7,38.925 34.7,38.925 36.7,38.925 38.7,38.925 40.7,38.925 42.7,38.925 44.7,38.925 46.7,38.925
NetAE1_1: AE1.1 C15.2 R6.2 | length 3.9
  Top Layer w0.5: R6.2 C15.2 AE1.1@49.628,33.991
NetBAT_1: BAT.1 D4.2
NetC1_1: C1.1 U1.1 | length 2
  Top Layer w0.5: U1.1 16.55,8.258 16.6,8.308 C1.1
NetC1_2: C1.2 L1.1 U1.6
NetC10_2: C10.2 L2.1 U3.21 | length 2.7
  Top Layer w0.5: 28.45,27.825 28.595,27.825 28.736,27.825 C10.2 ; C10.2@29.8,27.825 31,27.825
NetC11_2: C11.2 L2.2 U4.1 | length 3.3
  Top Layer w0.5: L2.2 C11.2 U4.1@35.6,27.825
NetC12_2: C12.2 R3.2 R4.1 | length 8.2
  Top Layer w0.5: R3.2 41.476,24.877 ccw(c43.272,26.673) 43.272,24.133 C12.2 R4.1
NetC13_2: C13.2 J1.1 R4.2 | length 5
  Top Layer w0.5: R4.2 C13.2 J1.1
NetC14_2: C14.2 R5.2 R6.1 | length 9
  Top Layer w0.5: R5.2 40.456,29.748 ccw(c38.66,31.544) 41.2,31.544 41.2,32.419 cw(c42.742,32.419) 42.742,33.962 43.171,33.962 C14.2 R6.1
NetC16_1: C16.1 D1.A R13.2 SW1.1 SW1.2 U3.7 | length 34.9
  Top Layer w0.2: C16.1 8.858,24.942 v1(8.35,25.45) 7.825,25.975 7.825,26.515 D1.A 7.727,26.617 R13.2 ; v1(25,22.325) 25.025,22.35 25.025,23.175 U3.7
  Top Layer w0.3: C16.1 10.275,24.35 10.775,24.85 SW1.2
  Bottom Layer w0.2: v1(8.35,25.45) 9.3,26.4 22.449,26.4 25,23.849 v1(25,22.325) ; SW1.2 11.125,24.85 12.125,25.85 16.6,25.85 SW1.1
NetC17_2: C17.2 U3.2 X2.1 X3.1 | length 17.3
  Top Layer w0.2: U3.2 22.5,23.15 22.5,22.766 21.7,21.966 21.7,20.059 24.959,16.8 ; 24.961,16.8 26.153,15.608 C17.2 30.092,15.608 X2.1 31.4,15.6 32.05,14.95 X3.1
NetC18_1: C18.1 U3.3 X2.2 X3.4 | length 16.2
  Top Layer w0.2: U3.3 23.05,22.75 22.15,21.85 22.15,20.175 25.125,17.2 27.792,17.2 C18.1 30.008,17.192 X2.2 31.2,17.1 31.95,17.85 X3.4
NetCN3_5: CN3.5 D1.K | length 34.7
  Top Layer w0.3: v1(7.725,28.325) D1.K
  Bottom Layer w0.3: v1(7.725,28.325) 7.725,26.524 2,20.799 2,13.247 11.767,3.48 CN3.5@13.69,3.48
NetCN4_1: CN4.1 U3.13 | length 36.6
  Top Layer w0.2: U3.13 28.45,23.825 31.3,20.975 40.191,20.975 43.1,18.066 43.1,6.866 40.634,4.4 38,4.4 CN4.1@36.618,3.018
NetCN4_2: CN4.2 U3.14 | length 35.6
  Top Layer w0.2: U3.14 28.225,24.275 28.574,24.275 28.75,24.099 31.474,21.375 40.356,21.375 43.5,18.231 43.5,17.45 43.5,6.7 39.3,2.5 CN4.2
NetCN4_3: CN4.3 U3.15 | length 35.3
  Top Layer w0.2: U3.15 28.225,24.775 28.64,24.775 29.15,24.265 31.64,21.775 36.025,21.775 40.522,21.775 43.9,18.397 43.9,4.84 CN4.3
NetCN4_4: CN4.4 U3.16 | length 35.1
  Top Layer w0.2: U3.16 28.225,25.275 28.706,25.275 29.55,24.431 31.806,22.175 36.225,22.175 40.688,22.175 44.3,18.563 44.3,2.7 CN4.4
NetCN4_5: CN4.5 U3.17 | length 37.4
  Top Layer w0.2: U3.17 28.721,25.825 29.95,24.596 31.971,22.575 40.853,22.575 44.7,18.728 44.7,6.8 46.7,4.8 46.7,1.62 CN4.5@46.68,1.6
NetCN5_4: CN5.4 R11.2 U3.36 U5.1 | length 37.3
  Top Layer w0.2: v1(5.225,16.75) 7.05,16.75 R11.2 11.617,17.417 12.2,18 13.5,18 13.9,18.4 U5.1 ; v1(12.7,22.3) 12.675,22.325 12.675,27.35 15.725,30.4 19.358,30.4 19.808,29.95 U3.36
  Bottom Layer w0.2: v1(5.225,16.75) 5.225,18.125 9.36,22.26 12.66,22.26 v1(12.7,22.3)
NetCOM1_1: COM1.1 U6.10 | length 10.3
  Top Layer w0.3: COM1.1@3.2,26.849 COM1.1 5.975,28.875 5.975,30.45 7.375,31.85 U6.10@9.4,31.85
NetCOM2_1: COM2.1 U6.6 | length 10.6
  Top Layer w0.3: U6.6@9.435,33.85 10.724,33.85 11.099,34.225 v1(11.85,34.225)
  Bottom Layer w0.3: v1(11.85,34.225) 11.875,34.2 15.3,34.2 17.9,36.8 COM2.1
NetD2_1: D2.1 R9.2 | length 4
  Top Layer w0.3: R9.2 D2.1@58.3,13.1
NetD3_1: D3.1 R10.2 | length 3.8
  Top Layer w0.3: R10.2 56.6,6.1 57.15,6.65 D3.1
NetNC1_1: NC1.1 U6.9 | length 8.3
  Top Layer w0.3: NC1.1@2.6,36.1 6.35,32.35 U6.9@9.381,32.35
NetNC2_1: NC2.1 U6.7 | length 4.9
  Top Layer w0.3: NC2.1@7.8,36.9 7.8,34.224 8.674,33.35 U6.7@9.694,33.35
NetNO1_1: NO1.1 U6.2 | length 11.8
  Top Layer w0.3: v1(9.1,31.2) 10.8,31.2 11.95,32.35 U6.2@13.942,32.35
  Bottom Layer w0.3: NO1.1@2.625,31.125 8.2,31.125 8.275,31.2 v1(9.1,31.2)
NetNO2_1: NO2.1 U6.4 | length 4.5
  Top Layer w0.3: NO2.1@12.8,36.8 12.725,36.725 12.725,33.704 13.079,33.35 U6.4@13.904,33.35
NetR1_1: R1.1 R2.2 U1.3 | length 3.7
  Top Layer w0.381: R1.1 14.104,11.588 14.104,10.104 R2.2 14.65,9.558 U1.3
NetR3_1: R3.1 R5.1 U4.3 | length 1.4
  Top Layer w0.5: 37.1,27.817 R5.1
NetR7_1: R7.1 SW2.1 SW2.2 | length 9.8
  Top Layer w0.5: R7.1 28.4,6.875 28.825,6.45 SW2.2 SW2.1
NetR7_2: R7.2 U3.9 | length 40.1
  Top Layer w0.2: U3.9 26.1,23.15 26.1,22.5 27.2,21.4 29.744,21.4 30.969,20.175 39.859,20.175 42.275,17.759 42.275,13.667 41.359,12.751 29.576,12.751 28.4,11.575 R7.2
NetR8_1: R8.1 SW3.1 SW3.2 | length 9.7
  Top Layer w0.5: R8.1 38.6,6.95 39.05,6.5 40.3,6.5 SW3.2
  Bottom Layer w0.5: SW3.2 SW3.1
NetR8_2: R8.2 U3.10 | length 29.9
  Top Layer w0.2: U3.10 26.55,22.616 27.366,21.8 29.909,21.8 31.134,20.575 40.025,20.575 42.7,17.9 42.7,13.317 41.734,12.351 40.266,12.351 38.6,10.685 R8.2
NetR9_1: R9.1 TP5.1 U3.5 | length 39.7
  Top Layer w0.2: v1(23.7,21.925) 23.7,21.942 24,22.242 24,23.15 U3.5
  Top Layer w0.3: v1(53,14.1) 53.008,14.108 54.292,14.108 R9.1
  Bottom Layer w0.2: v1(23.7,21.925) 23.7,21.276 24.126,20.85 25,20.85 28.15,24 37.766,24 41.466,20.3 46.8,20.3 v1(53,14.1)
  Bottom Layer w0.3: TP5.1 v1(53,14.1)
NetR10_1: R10.1 TP6.1 U3.6 | length 47.6
  Top Layer w0.2: v1(24.375,21.45) 24.4,21.475 24.4,22.574 24.5,22.674 24.5,23.15 U3.6
  Top Layer w0.3: v1(52.9,7.1) 52.908,7.108 54.292,7.108 R10.1
  Bottom Layer w0.2: v1(24.375,21.45) 25.025,21.45 27.975,24.4 37.931,24.4 41.431,20.9 47.049,20.9 53.6,14.349 53.6,7.8 v1(52.9,7.1) TP6.1
NetR12_1: R12.1 U3.4 | length 2.9
  Top Layer w0.2: R12.1 22.967,22.101 23.5,22.634 23.5,23.15 U3.4
NetU3_24: U3.24 X1.1 | length 6.4
  Top Layer w0.2: U3.24 28.208,29.325 28.258,29.375 28.258,29.658 28.5,29.9 29.9,29.9 30.9,30.9 30.9,32.4 30.425,32.875 X1.1
NetU3_25: U3.25 X1.3 | length 2.3
  Top Layer w0.2: U3.25 27.55,31 28.375,31.825 X1.3
OUT1: TP7.1 U3.29 U6.1 | length 14.5
  Top Layer w0.2: U6.1@13.844,31.9 17.283,31.9 17.583,32.2 v1(17.6,32.2) ; v1(25.54,30.831) 25.545,30.826 25.545,29.955 U3.29
  Bottom Layer w0.2: v1(17.6,32.2) 18.3,31.5 20.75,31.5 21.753,32.503 TP7.1@21.803,32.503 ; TP7.1@21.824,32.524 22.3,33 23.45,33 25.54,30.91 v1(25.54,30.831)
OUT2: TP8.1 U3.28 U6.5 | length 17.9
  Top Layer w0.2: U6.5 16.242,33.85 16.392,34 v1(16.5,34) ; U3.28@26.088,29.988 U3.28 26.05,30.4 26.298,30.648 26.298,31.423 v1(26.3,31.425)
  Bottom Layer w0.2: v1(16.5,34) 19.3,34 21.15,35.85 23.3,35.85 23.3,33.75 25.625,31.425 v1(26.3,31.425)
SWCLK: CN3.2 U3.41 | length 22.9
  Top Layer w0.2: v1(20.3,25.625) 20.3,26.549 21.026,27.275 21.375,27.275 U3.41
  Bottom Layer w0.2: v1(20.3,25.625) 20.192,25.625 19.5,24.933 19.5,10.075 21.51,8.065 CN3.2
SWDIO: CN3.4 U3.39 | length 25.1
  Top Layer w0.2: v1(18.9,22.775) 18.9,22.883 18.75,23.033 18.75,26.969 20.106,28.325 U3.39
  Bottom Layer w0.2: CN3.4@16.23,6.32 16.43,6.52 16.43,8.355 18.9,10.825 v1(18.9,22.775)
UART_RX: CN1.2 TP4.1 U3.12 | length 34.4
  Top Layer w0.2: U3.12 27.575,23.175 28.15,23.175 28.473,22.852 28.473,22.477 v1(28.55,22.4)
  Bottom Layer w0.2: v1(28.55,22.4) 30.2,22.4 TP4.1 33.5,20.5 40.7,20.5 45.675,15.525 48.949,15.525 52.4,12.074 52.4,10.102 51.098,8.8 CN1.2
UART_TX: CN1.1 TP3.1 U3.11 | length 29.9
  Top Layer w0.2: U3.11 27.05,22.681 27.252,22.479 27.576,22.479 v1(27.653,22.403)
  Bottom Layer w0.2: v1(27.653,22.403) 27.653,22.397 28.776,21.274 29.726,21.274 TP3.1 40.434,20.1 45.634,14.9 48.9,14.9 50.8,13 CN1.1
USB_N: CN5.2 U3.37 U5.6 | length 20.3
  Top Layer w0.3: CN5.2@7.2,18.2 9.33,18.2 12.03,20.9 13.574,20.9 13.75,21.076 13.75,21.6 U5.6 13.9,22.05 14.125,22.275 14.125,23.971 19.479,29.325 U3.37
USB_P: CN5.3 U3.38 U5.5 | length 20.8
  Top Layer w0.3: CN5.3@7.05,17.55 9.387,17.55 12.237,20.4 13.945,20.4 14.55,21.005 14.55,21.15 14.85,21.45 U5.5 14.85,22.05 14.625,22.275 14.625,23.763 19.687,28.825 U3.38
pads on no net: AE1. CN3.6 D2.3 D3.3 F1.1 U2.4 U3.18 U3.19 U3.26 U3.27 U3.30 U3.42 U3.43 U3.44 U3.45 U3.46 U3.47 U5.4 X3.2 X3.3

## Polygon pours and split planes (outlines as drawn)
GND on Top Layer "GND_L01_P014" (solid, remove dead copper, pour order 14): 0,0 60,0 60,40 0,40
NetC1_2 on Top Layer "NETC1_2_L01_P001" (solid, pour order 1): 16.1,6.7 16.1,5 18.9,5 18.9,0.9 27.5,0.9 27.5,4.8 19.7,4.8 19.7,7.8 17.5,7.8 17.5,6.7
3V3 on Top Layer "3V3_L01_P004" (solid, pour order 4): 25.825,21.875 25.825,18.725 24.7,18.725 24.7,21.875
5V on Top Layer "5V_L01_P002" (solid, pour order 2): 19.7,4.8 27.5,4.8 27.5,9.3 22.2,9.3 22.2,11.5 22.2,13 17.2,13 17.2,9.4 19.7,9.4
BAT on Top Layer "BAT_L01_P000" (solid, pour order 0): 9.8,5.2 9.8,0 16.1,0 16.1,6.7 13.8,6.7 13.8,5.2
NetBAT_1 on Top Layer "NETBAT_1_L01_P012" (solid, pour order 12): 9.5,5.8 0,5.8 0,0 9.5,0
3V3 on Top Layer "3V3_L01_P008" (solid, pour order 8): 24.1,31 24.1,38.375 21.4,38.375 21.4,31
3V3 on Top Layer "3V3_L01_P007" (solid, pour order 7): 22.6,17.5 19.8,17.5 19.8,13.2 22.6,13.2
GND on Bottom Layer "GND_L02_P013" (solid, pour order 13): 0,0 60,0 60,40 0,40
3V3 on Bottom Layer "3V3_L02_P011" (solid, pour order 11): 19.8,18.1 24.4,18.1 24.4,20.9 25.5,20.9 25.5,17 19.8,17
3V3 on Bottom Layer "3V3_L02_P009" (solid, pour order 9): 19.8,17.5 21.3,17.5 21.3,13.2 19.8,13.2

## Keep-outs
Keep-Out Layer:
  the board outline again, w1

## Other copper
Top Layer:
  region net BAT: 12.225,3.3 12.225,2.3 11.725,2.3 11.725,3.3
  region net BAT: 10.8,3.3 10.8,2.3 10.3,2.3 10.3,3.3
  region net NetBAT_1: 8.9,3.3 8.9,2.3 8.4,2.3 8.4,3.3
  region net NetBAT_1: 7.575,3.3 7.575,2.3 7.075,2.3 7.075,3.3
  region net GND: 26.7,37.2 27.5,37.2 27.5,35.6 26.7,35.6
  region net GND: 25,37.2 25.8,37.2 25.8,35.6 25,35.6
  region net 3V3: 22,37.2 22.8,37.2 22.8,35.6 22,35.6
  region net NetC1_2: 25.45,2.6 21.15,2.6 21.15,1.6 25.45,1.6
  region net NetC1_2: 25.45,4.2 21.15,4.2 21.15,3.2 25.45,3.2
  region net 5V: 25.4,6.5 21.1,6.5 21.1,5.5 25.4,5.5
  region net 5V: 25.4,8.9 21.1,8.9 21.1,7.9 25.4,7.9
  pour cut-out: 16.975,9.4 16.975,8.625 18.925,8.625 18.95,8.65 18.95,7.925 19.6,7.925 19.6,9.3 17.075,9.3
  pour cut-out: 6.43,18.7 6.43,15.7 6.405,15.675 4.355,15.675 4.355,17.261 4.414,17.32
  pour cut-out: 55.15,25.075 55.15,23.2 55.148,23.198 52.75,23.198 52.75,25.068
  pour cut-out: 40.35,10.95 38.89,10.95 38.877,10.962 38.6,10.685 38.6,6.95 39.1,6.45 40.35,6.45
  pour cut-out: 44.822,7.014 46.822,5.014 46.822,1.834 36.662,1.834 36.74,1.912 36.74,3.232 37.897,4.389 40.657,4.389 43.222,6.955
  pour cut-out: 13.945,20.4 13.9,20.355 13.9,18.4 13.5,18 12.2,18 11.617,17.417 11.617,16.75 7.998,16.75 7.973,16.775 7.973,17.7 9.537,17.7 12.237,20.4
Bottom Layer:
  pour cut-out: 16.717,26.4 16.6,26.283 16.6,25.075 18.9,22.775 19.446,23.321 19.5,23.321 19.5,24.825 20.367,25.692 20.367,26.4
  pour cut-out: 9.925,28.325 10,28.4 11.075,28.4 11.542,28.867 11.542,30.8 10.877,31.465 9.55,30.138 9.55,28.675
  pour cut-out: 33.257,20.1 33.237,20.12 33.237,20.763 30.9,23.1 30.2,22.4 28.55,22.4 28.56,22.39 28.56,21.49 28.776,21.274 29.726,21.274 30.9,20.1
  pour cut-out: 30.836,24 30.836,22.664 30.9,22.6 30.697,22.397 27.617,22.397 27.057,22.957 28.1,24

## Silkscreen, mask and mechanical layers (free items; w line width, h text height)
Bottom Overlay:
  text "OUT2" at 24.775,37.014 h1.3
  text "OUT1" at 22.95,30.389 h1.3
  text "UART_RX" at 33.55,24.456 h1.3
  text "UART_TX" at 33.45,18.056 h1.3
  text "5V" at 18.75,15.714 h1.3
  text "3V3" at 24.55,15.664 h1.3
  text "D2" at 52.225,15.225 h1.3
  text "D3" at 55.75,8.264 h1.3
Board Outline:
  the board outline again, w0.2
Manufacturing Notes:
  lines w0.4: 0.2,49.522 8.574,49.522 24.771,49.522 39.325,49.522 51.28,49.522 62.344,49.522 ; 0.2,53.522 8.574,53.522 24.771,53.522 39.325,53.522 51.28,53.522 62.344,53.522 ; 0.2,57.522 8.574,57.522 24.771,57.522 39.325,57.522 51.28,57.522 62.344,57.522 ; 0.2,61.522 8.574,61.522 24.771,61.522 39.325,61.522 51.28,61.522 62.344,61.522 ; 0.2,65.522 8.574,65.522 24.771,65.522 39.325,65.522 51.28,65.522 62.344,65.522 ; 0.2,69.522 8.574,69.522 24.771,69.522 39.325,69.522 51.28,69.522 62.344,69.522 ; 0.2,73.522 62.344,73.522 ; 8.574,77.522 8.574,45.522 ; 24.771,77.522 24.771,45.522 ; 39.325,77.522 39.325,45.522 ; 51.28,77.522 51.28,45.522 ; 8.574,45.522 24.771,45.522 ; 8.574,45.522 0.2,45.522 0.2,77.522 62.344,77.522 62.344,45.522 51.28,45.522 ; 24.771,45.522 39.325,45.522 ; 39.325,45.522 51.28,45.522
  text "LAYER INFORMATION: / M2 - Board Outline / M3 - Manufacturing Notes" at 0,90.57 h2
  text "BOARD INFORMATION / Solder mask - green / Silk screen- white / Finish - HASL / Thickness - 0.8 FR-4." at 0,80 h2
  text "RF TRACK ANTENNA: / Coplanar Wave / Impedance Target 50 Ohms / Track Width 0.5 mm / Gap 0.15 mm / Refference Layer - BOTTOM / Dielectric constant 4.8" at 37.5,77.211 h2
  text "Layer" at 2.2,74.522 h2
  text "Name" at 10.574,74.522 h2
  text "Material" at 26.771,74.522 h2
  text "Thickness" at 41.325,74.522 h2
  text "Constant" at 53.28,74.522 h2
  text "Top Overlay" at 10.574,70.522 h2
  text "Top Solder" at 10.574,66.522 h2
  text "Solder Resist" at 26.771,66.522 h2
  text "0.010mm" at 41.325,66.522 h2
  text "3.5" at 53.28,66.522 h2
  text "1" at 2.2,62.522 h2
  text "Top Layer" at 10.574,62.522 h2
  text "0.036mm" at 41.325,62.522 h2
  text "Dielectric 1" at 10.574,58.522 h2
  text "FR-4" at 26.771,58.522 h2
  text "0.700mm" at 41.325,58.522 h2
  text "4.8" at 53.28,58.522 h2
  text "2" at 2.198,54.522 h2
  text "Bottom Layer" at 10.574,54.522 h2
  text "0.036mm" at 41.325,54.522 h2
  text "Bottom Solder" at 10.574,50.522 h2
  text "Solder Resist" at 26.771,50.522 h2
  text "0.010mm" at 41.325,50.522 h2
  text "3.5" at 53.28,50.522 h2
  text "Bottom Overlay" at 10.574,46.522 h2
  text "Total board thickness:" at 2.2,42.522 h2
  text "0.791mm" at 41.325,42.522 h2

## Text inside footprints (layer, text, board x,y; h text height)
CN3: Bottom Overlay "1" at 25.5,2.3 h1.3